# Altium PCB ELOP_V0.90.pcbdoc (part 2 of 2)
Units mm, origin at the board's own origin, x right, y up, seen from the top; angles counter-clockwise.
Board outline 80 x 80.13 mm, 4 copper layers (Top Layer, Mid-Layer 1, Mid-Layer 2, Bottom Layer); 239 components, 164 nets, 744 pads, 242 vias.
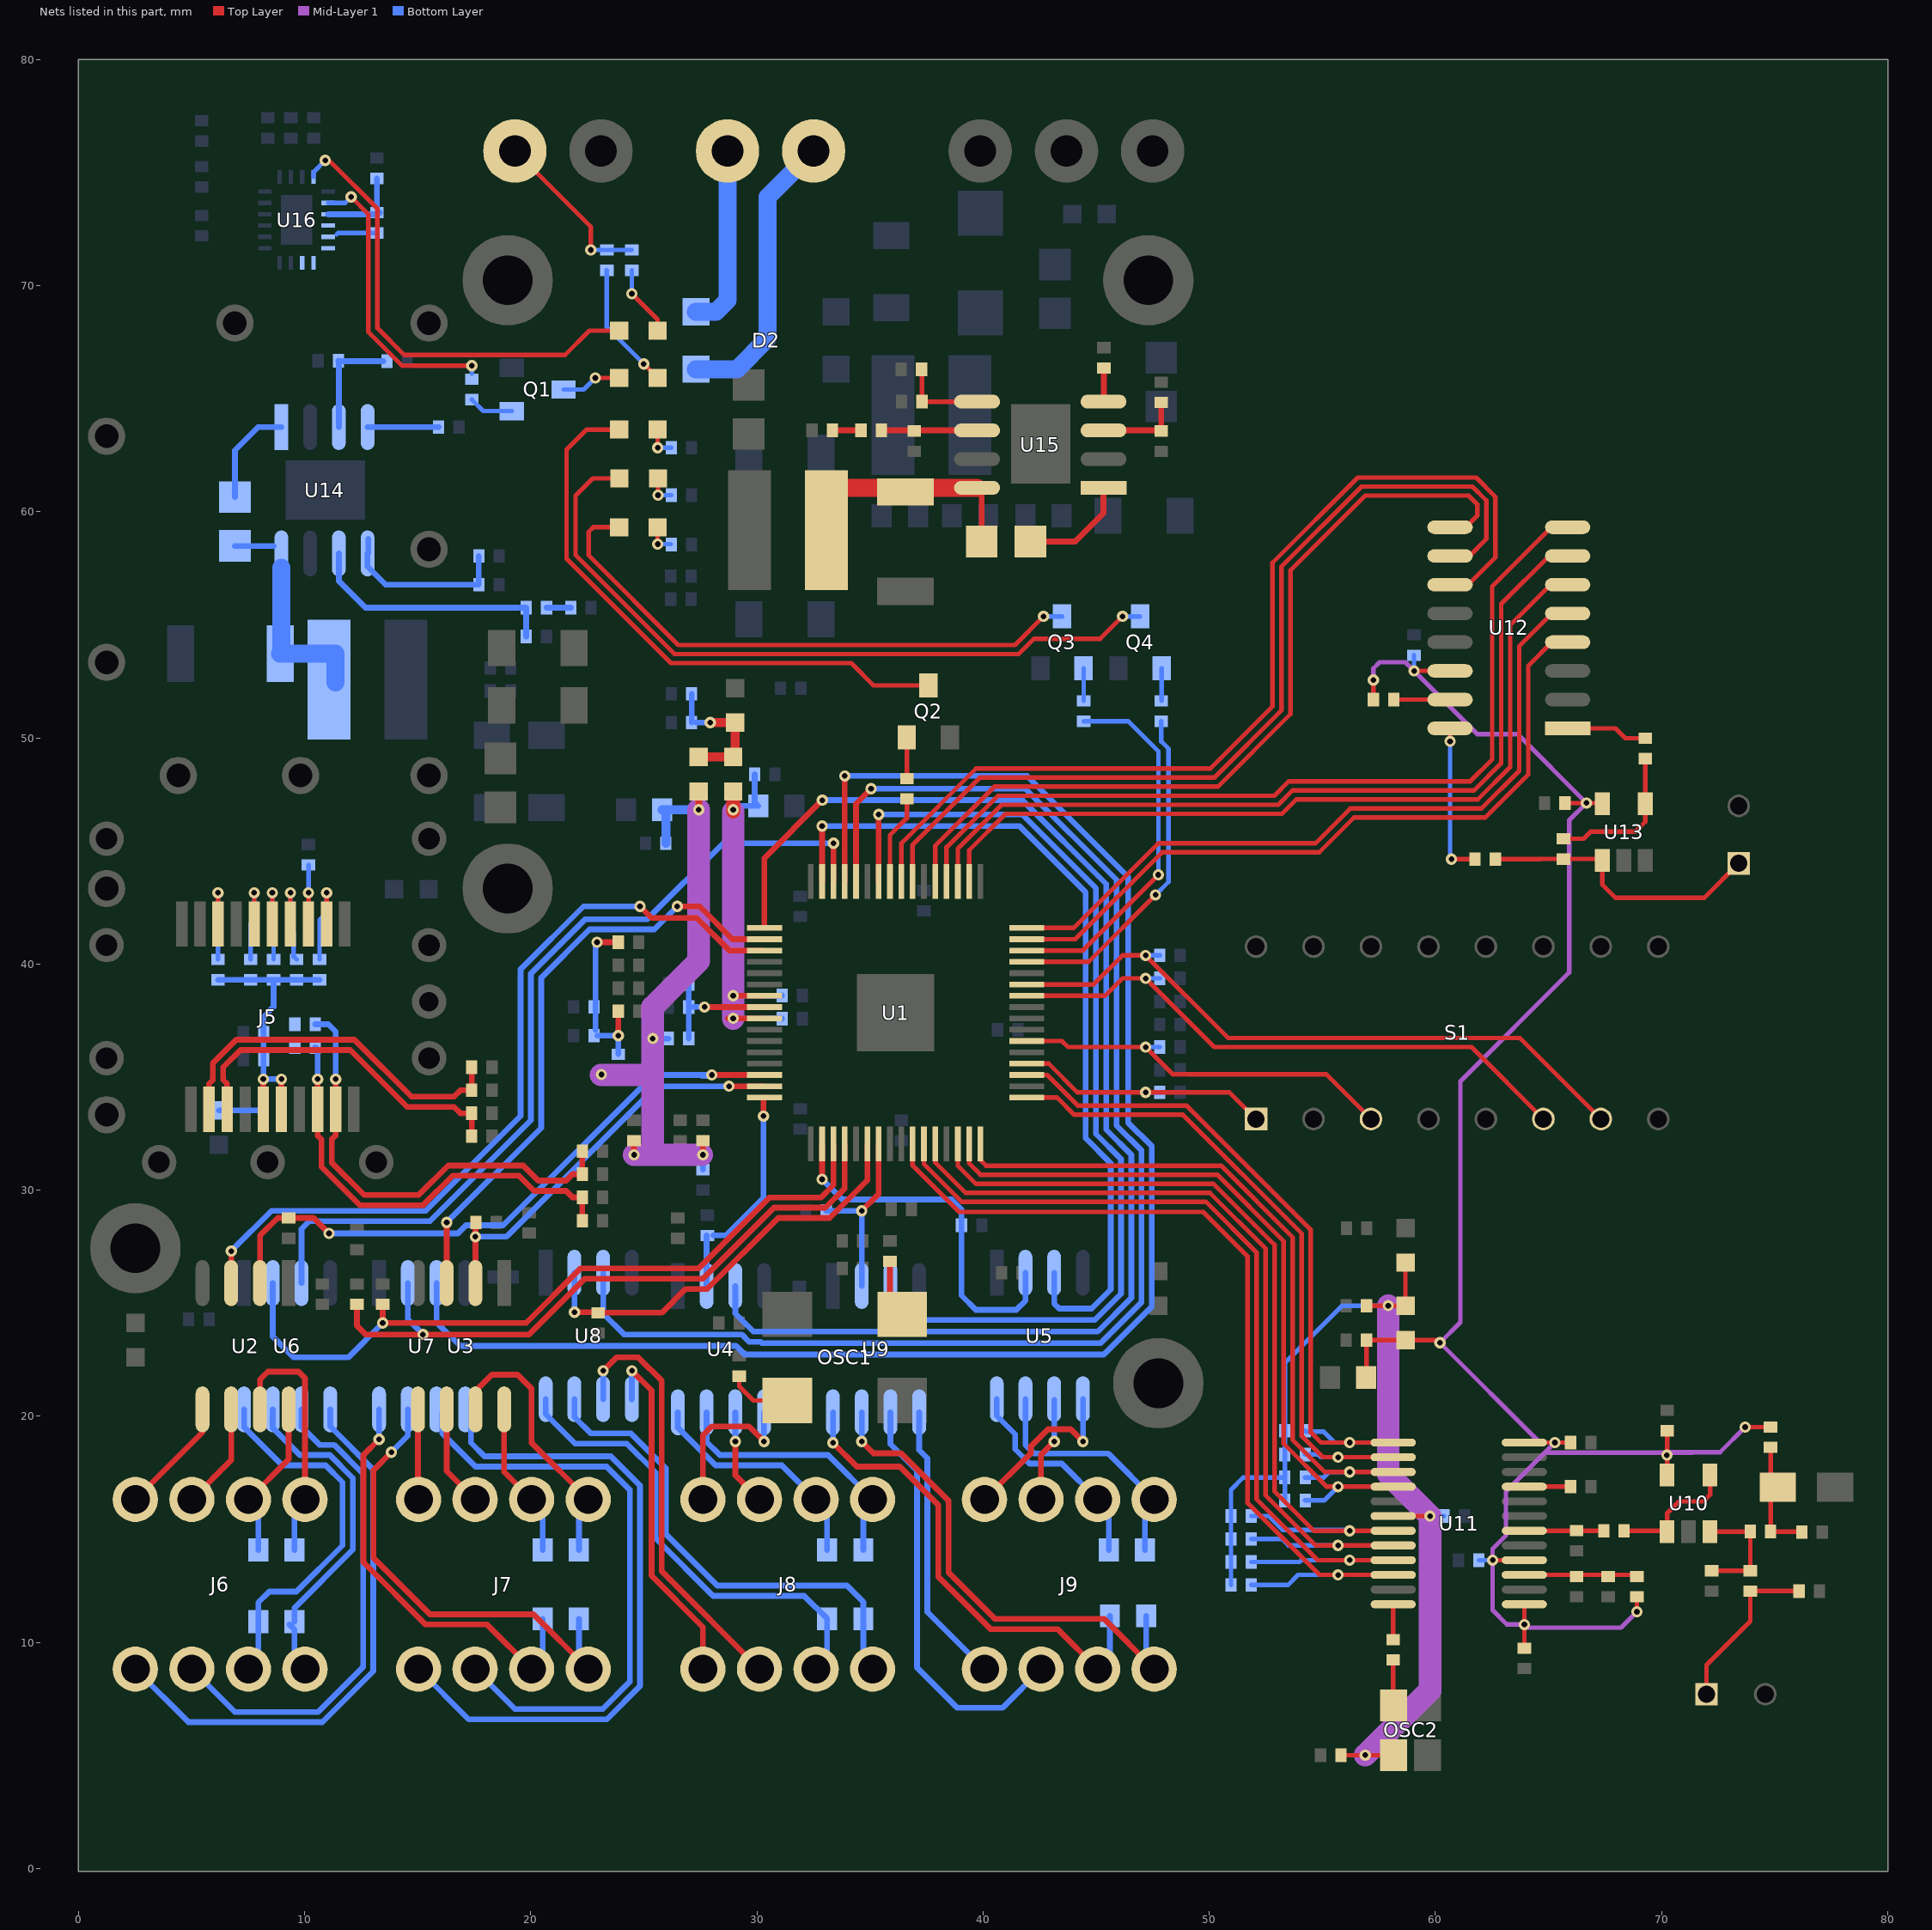
[diagram p4: the nets of this part, all layers, seen from the top]

## Via types
v1: diameter 0.5, hole 0.25, Top Layer to Bottom Layer, 240 vias
v2: diameter 2, hole 1.9, Top Layer to Bottom Layer, 2 vias

## Nets (pads, with @x,y where several pads share a name; then routed paths per layer and width w, separated by ;. In a path a pad name is that pad's centre, name@x,y a point inside that pad or via, vN(x,y) a via of type N, cw(c..) or ccw(c..) an arc to the next point about the centre after c; other vN are vias at no path point) (continued)
N16728327: C19.1 U14.1 | length 4.6
  Bottom Layer w0.254: C19.1@6.927,60.643 6.927,62.711 7.956,63.74 U14.1@8.983,63.74
N16728331: C19.2 L3.1 U14.8 ZD1.2 | length 9.2
  Bottom Layer w0.254: C19.2@6.927,58.484 8.651,58.484
  Bottom Layer w0.8: ZD1.2@8.931,53.721 ZD1.2@8.983,53.721 ; U14.8@8.983,57.517 ZD1.2@8.983,53.721 ; L3.1@11.381,52.451 11.381,53.721 ZD1.2@8.983,53.721
N16728383: R42.2 R45.1 U14.3 | length 4.9
  Bottom Layer w0.254: R42.2@11.502,66.675 R42.2@11.523,66.654 ; U14.3@11.523,63.74 R42.2@11.523,66.654 ; R45.1@13.486,66.654 R42.2@11.523,66.654
N16728489: C20.2 R44.1 U14.6 | length 11.3
  Bottom Layer w0.254: U14.6@11.523,58.152 11.523,56.93 12.7,55.753 R44.1@19.807,55.753 C20.2@19.807,54.483
N16728505: R43.2 R47.1 U14.5 | length 7.8
  Bottom Layer w0.254: U14.5@12.827,58.801 12.827,58.186 U14.5@12.793,58.152 12.793,57.565 13.589,56.769 R43.2@17.711,56.769 R47.1@17.711,58.039
N16728557: R46.1 U14.4 | length 3.1
  Bottom Layer w0.254: U14.4@12.793,63.74 R46.1@15.933,63.74
N16728739: C21.2 R44.2 | length 1.1
  Bottom Layer w0.254: R44.2@20.706,55.753 C21.2@21.775,55.753
N16729351: C22.1 U15.1 | length 4.9
  Top Layer w0.254: C22.1@42.1,58.674 44.069,58.674 45.325,59.93 U15.1@45.325,61.053
N16729355: C22.2 L4.1 U15.8 ZD2.2 | length 10.8
  Top Layer w0.254: U15.8@39.737,61.053 39.941,60.848 C22.2@39.941,58.674
  Top Layer w0.8: L4.1@33.069,59.182 33.069,60.755 33.367,61.053 U15.8@39.737,61.053
N16729407: R48.2 R52.1 U15.3 | length 3.8
  Top Layer w0.254: U15.3@45.325,63.593 47.855,63.593 R48.2@47.879,63.569 R52.1@47.879,64.828
N16729513: C23.2 R51.1 U15.6 | length 4.2
  Top Layer w0.254: R51.1@35.502,63.593 U15.6@39.737,63.593
N16729529: R50.2 R54.1 U15.5 | length 3.8
  Top Layer w0.2: R54.1@37.3,66.274 R50.2@37.3,64.863 U15.5@39.737,64.863
N16729581: R53.1 U15.4 | length 1.5
  Top Layer w0.254: U15.4@45.339,64.877 R53.1@45.339,66.352
N16729763: C24.2 R51.2 | length 1.3
  Top Layer w0.254: C24.2@33.343,63.593 R51.2@34.602,63.593
N16731534: J5.2 R70.1 | length 4.5
  Top Layer w0.2: J5.2@10.982,41.774 v1(10.982,43.149)
  Bottom Layer w0.2: R70.1@10.668,40.203 10.668,41.945 10.982,42.259 v1(10.982,43.149)
N16731538: J5.4 R71.1 | length 4.4
  Top Layer w0.2: J5.4@9.382,41.774 v1(9.382,43.149)
  Bottom Layer w0.2: v1@9.382,43.139 9.382,41.545 9.525,41.402 9.525,40.33 R71.1@9.652,40.203
N16731542: J5.5 R72.1 | length 4.3
  Top Layer w0.2: J5.5@8.582,41.774 v1(8.582,43.149)
  Bottom Layer w0.2: v1@8.582,43.139 8.582,41.837 8.636,41.783 R72.1@8.636,40.203
N16731546: J5.6 R73.1 | length 4.4
  Top Layer w0.2: J5.6@7.782,41.774 v1(7.782,43.149)
  Bottom Layer w0.2: R73.1@7.62,40.203 7.62,41.783 7.782,41.945 v1@7.782,43.139
N16731550: J5.8 R74.1 | length 4.3
  Top Layer w0.2: J5.8@6.182,41.774 v1(6.182,43.149)
  Bottom Layer w0.2: R74.1@6.182,40.203 v1@6.182,43.139
N16735624: OSC1.1 R1.2 | length 2.8
  Top Layer w0.2: R1.2@29.225,21.775 29.225,21.327 29.851,20.701 OSC1.1@31.347,20.701
N16738020: J5.3 R75.2 | length 2.6
  Top Layer w0.2: J5.3@10.182,41.774 v1(10.182,43.149)
  Bottom Layer w0.2: v1@10.182,43.139 v1(10.182,43.149) R75.2@10.182,44.381
N16739629: BC10.1 BC11.1 R8.1 U1.56 | length 5.7
  Top Layer w0.254: v1@27.755,38.1 27.759,38.096 U1.56@30.337,38.096
  Bottom Layer w0.254: R8.1@26.993,36.703 BC11.1@26.993,39.116 ; BC10.1@27.062,38.1 v1@27.755,38.1
  other v1: 27.686,38.1
N16740524: C1.1 R3.1 R5.2 R6.2 R7.1 | length 9.2
  Top Layer w0.254: v1(22.937,40.96) R6.2@23.876,40.96 ; v1(23.876,36.83) R7.1@23.876,37.912
  Bottom Layer w0.254: C1.1@22.871,38.354 22.871,37.084 22.871,40.894 v1(22.937,40.96) ; R3.1@22.94,36.83 v1(23.876,36.83) ; R5.2@23.876,36.012 23.876,37.084
N16750010: R57.2 R63.1 U16.3 | length 3.6
  Bottom Layer w0.254: U16.3@11.052,73.149 13.263,73.149 R57.2@13.335,73.221 ; 13.208,73.476 R63.1@13.208,74.735
N16750728: LD1.1 R49.2 | length 3.1
  Top Layer w0.2: v1(24.473,69.634) 25.616,68.491 LD1.1@25.616,68.003
  Bottom Layer w0.2: v1(24.473,69.634) R49.2@24.473,70.67
N16751148: Q1.1 R59.2 | length 2
  Bottom Layer w0.2: R59.2@17.399,64.955 17.908,64.446 Q1.1@19.166,64.446
N16751168: LD2.2 Q1.3 | length 2.7
  Top Layer w0.2: v1(22.86,65.913) LD2.2@23.914,65.913
  Bottom Layer w0.2: Q1.3@21.459,65.4 22.347,65.4 v1(22.86,65.913)
N16751222: LD2.1 R55.2 | length 5.7
  Top Layer w0.2: v1(25,66.529) LD2.1@25.616,65.913
  Bottom Layer w0.2: R55.2@23.368,70.67 23.368,68.161 v1(25,66.529)
N16760869: C12.2 U11.9 | length 2
  Top Layer w0.2: U11.9@63.931,16.891 C12.2@65.971,16.891
N16760876: C11.2 R24.1 R32.2 U11.3 | length 4.9
  Top Layer w0.2: U11.3@63.931,12.991 R24.1@68.836,12.991
N16761223: R34.2 U11.24 | length 1.6
  Top Layer w0.2: R34.2@58.131,10.128 U11.24@58.131,11.691
N16761347: OSC2.3 R34.1 | length 2
  Top Layer w0.2: R34.1@58.131,9.228 58.131,7.247 OSC2.3@58.156,7.222
N16761501: R36.2 U12.1 | length 3.6
  Top Layer w0.2: U12.1@65.846,50.419 67.957,50.419 68.396,49.98 R36.2@69.276,49.98
N16765774: C13.2 R36.1 U13.4 | length 6.7
  Top Layer w0.2: C13.2@65.659,45.535 66.548,45.535 66.86,45.847 68.834,45.847 69.276,46.289 U13.4@69.276,47.083 R36.1@69.276,49.08
N16765905: R35.2 U12.16 | length 7
  Top Layer w0.2: v1(60.646,49.844) U12.16@60.646,50.419 ; v1@60.772,44.704 v1(60.705,44.637) 61.746,44.637 R35.2@61.751,44.633
  Bottom Layer w0.2: v1(60.646,49.844) 60.646,44.637 v1(60.705,44.637)
N16765917: C13.1 J1.1 R35.1 U13.1 | length 12.7
  Top Layer w0.2: R35.1@62.651,44.633 64.638,44.633 ; 64.643,44.646 U13.1@67.376,44.646 ; U13.1@67.376,44.583 67.376,43.507 67.957,42.926 71.882,42.926 J1.1@73.406,44.45
N16767696: R37.2 U12.15 | length 2.5
  Top Layer w0.2: R37.2@58.156,51.689 U12.15@60.646,51.689
N16768762: R21.2 U10.1 U10.4 | length 5.7
  Top Layer w0.2: R21.2@68.339,14.941 U10.1@70.104,14.941 ; U10.1@70.241,14.905 70.241,15.713 70.769,16.241 71.846,16.241 72.141,16.536 U10.4@72.141,17.405
N16768766: C10.1 R21.1 U11.6 | length 3.5
  Top Layer w0.2: U11.6@63.931,14.941 R21.1@67.439,14.941
N16769025: R20.1 R22.1 R23.2 U10.3 | length 5.1
  Top Layer w0.2: U10.3@72.141,14.905 R20.1@73.916,14.905 R22.1@73.916,13.303 ; R23.2@72.213,13.176 R22.1@73.916,13.176
N16769514: C9.1 MIC1.1 R22.2 | length 7.5
  Top Layer w0.2: MIC1.1@71.979,7.715 71.979,9.006 73.916,10.943 R22.2@73.916,12.276 C9.1@76.075,12.276
N16770088: C7.1 C8.1 R19.1 R20.2 | length 5.1
  Top Layer w0.2: R19.1@74.816,18.568 R20.2@74.816,14.905 76.182,14.905 C8.1@76.202,14.885
N16775363: LD3.1 R91.2 | length 1.4
  Top Layer w0.2: v1(25.616,62.827) LD3.1@25.616,63.627
  Bottom Layer w0.2: v1(25.616,62.827) R91.2@26.22,62.827
N16775383: LD3.2 Q2.3 | length 25.8
  Top Layer w0.2: LD3.2@23.914,63.627 22.479,63.627 21.59,62.738 21.59,57.912 26.2,53.302 34.171,53.302 35.153,52.32 Q2.3@37.582,52.32
N16775429: Q2.1 R92.2 | length 1.9
  Top Layer w0.2: R92.2@36.633,48.214 Q2.1@36.633,50.154
N16776229: LD4.1 R93.2 | length 1.4
  Top Layer w0.2: v1(25.616,58.563) LD4.1@25.616,59.309 LD4.1@25.632,59.325
  Bottom Layer w0.2: v1(25.616,58.563) R93.2@26.204,58.563
N16776249: LD4.2 Q3.3 | length 25.6
  Top Layer w0.2: LD4.2@23.914,59.309 22.771,59.309 22.566,59.104 22.566,58.068 26.531,54.102 41.41,54.102 v1(42.676,55.368)
  Bottom Layer w0.2: v1(42.676,55.368) Q3.3@43.493,55.368
N16776289: Q3.1 R94.2 | length 1.4
  Bottom Layer w0.2: R94.2@44.447,51.631 Q3.1@44.447,53.075
N16776515: LD5.1 R95.2 | length 1.3
  Top Layer w0.2: v1(25.632,60.728) LD5.1@25.632,61.468
  Bottom Layer w0.2: v1(25.632,60.728) R95.2@26.22,60.728
N16776535: LD5.2 Q4.3 | length 32.3
  Top Layer w0.2: LD5.2@23.93,61.468 22.752,61.468 21.99,60.706 21.99,58.078 26.366,53.702 41.575,53.702 42.248,54.375 45.177,54.375 v1(46.17,55.368)
  Bottom Layer w0.2: v1(46.17,55.368) Q4.3@46.94,55.368
N16776575: Q4.1 R96.2 | length 1.4
  Bottom Layer w0.2: R96.2@47.894,51.646 Q4.1@47.894,53.075
N16788461: OSC1.3 R97.1 | length 1.6
  Top Layer w0.254: OSC1.3@35.883,25.273 R97.1@35.883,26.855
PD_A: D2.2 J4.1 | length 8.2
  Bottom Layer w0.8: D2.2@27.307,68.835 28.195,68.835 28.702,69.342 J4.1@28.702,75.946
PD_B: D2.1 J4.2 | length 12.9
  Bottom Layer w0.8: D2.1@27.307,66.295 29.122,66.295 30.48,67.653 30.48,73.914 J4.2@32.512,75.946
POWER_FAULT: LD1.2 U16.20 | length 21
  Top Layer w0.2: v1(10.922,75.53) 11.086,75.53 13.227,73.388 13.227,68.111 14.409,66.929 21.521,66.929 22.595,68.003 LD1.2@23.914,68.003
  Bottom Layer w0.2: U16.20@10.402,74.799 10.402,75.01 v1(10.922,75.53)
POWER_GOOD: R59.1 U16.2 | length 12.9
  Top Layer w0.2: v1(12.065,73.914) 12.827,73.152 12.827,67.945 14.316,66.456 v1(17.399,66.456)
  Bottom Layer w0.2: U16.2@11.052,73.649 11.8,73.649 v1(12.065,73.914) ; 17.399,66.109 v1(17.399,66.456)
PRBSEN: R89.2 S1.6 U1.26 | length 26.4
  Top Layer w0.2: U1.26@41.937,38.596 45.403,38.596 46.17,39.363 v1(47.186,39.363) 50.222,36.327 61.59,36.327 S1.6@64.77,33.147 ; v1@47.119,39.43 v1@47.186,39.497
  Bottom Layer w0.2: v1(47.186,39.363) R89.2@47.815,39.363
PSE_A: J3.1 R49.1 R55.1 R57.1 U16.4 U16.5 U16.6 U16.7 U16.8 | length 9.7
  Top Layer w0.2: J3.1@19.304,75.946 22.664,72.586 v1(22.664,71.57)
  Bottom Layer w0.2: 11.43,72.263 11.488,72.321 R57.1@13.208,72.321 ; J3.1@19.304,75.634 J3.1@19.304,75.946 ; v1(22.664,71.57) R55.1@23.368,71.57 R49.1@24.473,71.57
R422RX_N0: J6.A4 R76.1 U2.7 | length 11.4
  Top Layer w0.254: U2.7@8.035,20.306 8.035,21.624 8.382,21.971 9.739,21.971 10.027,21.683 J6.A4@10.027,16.323
  Bottom Layer w0.254: R76.1@9.563,14.097 9.563,15.859 J6.A4@10.027,16.323
R422RX_N1: J7.A4 R77.1 U3.7 | length 12.2
  Top Layer w0.254: U3.7@17.56,20.306 17.56,21.116 18.288,21.844 19.417,21.844 20.046,21.215 20.046,18.823 J7.A4@22.546,16.323
  Bottom Layer w0.254: R77.1@22.136,14.097 22.136,15.913 J7.A4@22.546,16.323
R422RX_N2: J8.A4 R78.1 U4.7 | length 12.1
  Bottom Layer w0.254: U4.7@27.779,20.179 27.779,18.871 28.362,18.288 33.154,18.288 J8.A4@35.119,16.323 34.709,15.913 R78.1@34.709,14.097
R422RX_N3: J9.A4 R79.1 U5.7 | length 11.1
  Bottom Layer w0.254: U5.7@41.876,20.76 41.876,18.733 42.248,18.361 45.527,18.361 J9.A4@47.565,16.323 47.155,15.913 R79.1@47.155,14.097
R422RX_N4: J6.B4 R80.1 U6.7 | length 15
  Bottom Layer w0.254: U6.7@8.602,20.306 8.602,19.48 9.794,18.288 11.124,18.288 12.138,17.274 12.138,14.671 12.138,14.104 9.563,11.529 R80.1@9.563,10.922 ; R80.1@9.34,10.795 9.563,10.572 9.563,9.287 J6.B4@10.027,8.823
R422RX_N5: J7.B4 R81.1 U7.7 | length 21.1
  Top Layer w0.254: v1(13.843,18.415) 13.058,17.63 13.058,13.739 15.548,11.249 20.12,11.249 J7.B4@22.546,8.823
  Bottom Layer w0.254: v1(13.843,18.415) 14.571,19.143 U7.7@14.571,20.306 ; R81.1@22.136,11.049 22.136,9.233 J7.B4@22.546,8.823
R422RX_N6: J8.B4 R82.1 U8.7 | length 21.8
  Bottom Layer w0.254: U8.7@21.937,20.76 21.937,19.973 22.665,19.245 24.443,19.245 25.981,17.707 25.981,14.793 28.255,12.519 33.982,12.519 34.709,11.792 R82.1@34.709,11.049 34.709,9.233 J8.B4@35.119,8.823
R422RX_N7: J9.B4 R83.1 U9.7 | length 22.7
  Top Layer w0.254: v1(34.637,18.889) 35.157,18.369 36.375,18.369 38.481,16.263 38.481,13.088 40.52,11.049 45.339,11.049 J9.B4@47.565,8.823
  Bottom Layer w0.254: v1(34.637,18.889) U9.7@34.637,20.179 ; R83.1@47.21,11.176 47.21,9.178 J9.B4@47.565,8.823
R422RX_P0: J6.A3 R76.2 U2.8 | length 7.1
  Top Layer w0.254: J6.A3@7.527,16.323 9.305,18.101 U2.8@9.305,20.306
  Bottom Layer w0.254: J6.A3@7.527,16.323 7.963,15.887 R76.2@7.963,14.097
R422RX_P1: J7.A3 R77.2 U3.8 | length 6.9
  Top Layer w0.254: U3.8@18.83,20.306 18.83,17.539 J7.A3@20.046,16.323
  Bottom Layer w0.254: J7.A3@20.046,16.323 20.536,15.833 R77.2@20.536,14.097
R422RX_P2: J8.A3 R78.2 U4.8 | length 10.5
  Bottom Layer w0.254: U4.8@26.509,20.179 26.509,19.499 28.174,17.834 31.108,17.834 J8.A3@32.619,16.323 33.109,15.833 R78.2@33.109,14.097
R422RX_P3: J9.A3 R79.2 U5.8 | length 9.5
  Bottom Layer w0.254: U5.8@40.606,20.76 40.606,20.026 41.422,19.21 41.422,18.545 42.06,17.907 43.481,17.907 J9.A3@45.065,16.323 45.555,15.833 R79.2@45.555,14.097
R422RX_P4: J6.B3 R80.2 U6.8 | length 16.8
  Bottom Layer w0.254: U6.8@7.332,20.306 7.332,19.523 9.021,17.834 10.936,17.834 11.684,17.086 11.684,14.292 9.647,12.255 8.445,12.255 7.963,11.773 7.963,9.259 J6.B3@7.527,8.823
R422RX_P5: J7.B3 R81.2 U7.8 | length 18.9
  Top Layer w0.254: v1(13.301,18.982) 12.604,18.285 12.604,13.551 15.36,10.795 18.074,10.795 J7.B3@20.046,8.823
  Bottom Layer w0.254: v1(13.301,18.982) U7.8@13.301,20.306 ; J7.B3@20.046,8.823 20.536,9.313 R81.2@20.536,11.049
R422RX_P6: J8.B3 R82.2 U8.8 | length 21
  Bottom Layer w0.254: U8.8@20.667,20.76 20.667,20.1 21.976,18.791 24.255,18.791 25.527,17.519 25.527,14.605 28.067,12.065 32.093,12.065 R82.2@33.109,11.049 33.109,9.313 J8.B3@32.619,8.823
R422RX_P7: J9.B3 R83.2 U9.8 | length 21.6
  Top Layer w0.254: v1(33.367,18.83) 34.417,17.78 36.322,17.78 38.027,16.075 38.027,12.9 40.332,10.595 43.293,10.595 J9.B3@45.065,8.823
  Bottom Layer w0.254: v1(33.367,18.83) U9.8@33.367,20.179 ; J9.B3@45.065,8.823 45.61,9.368 R83.2@45.61,11.176
R422TX_N0: J6.A2 U2.6 | length 4.7
  Top Layer w0.254: J6.A2@5.027,16.323 6.765,18.061 U2.6@6.765,20.306
R422TX_N1: J7.A2 U3.6 | length 4.8
  Top Layer w0.254: U3.6@16.29,20.306 16.29,17.579 J7.A2@17.546,16.323 J7.A2@17.546,16.617
R422TX_N2: J8.A2 U4.6 | length 4.3
  Top Layer w0.254: v1(29.049,18.889) 29.049,17.393 J8.A2@30.119,16.323
  Bottom Layer w0.254: v1(29.049,18.889) U4.6@29.049,20.179
R422TX_N3: J9.A2 U5.6 | length 4.6
  Top Layer w0.254: J9.A2@42.565,16.323 42.565,18.308 v1(43.146,18.889)
  Bottom Layer w0.254: v1(43.146,18.889) U5.6@43.146,20.726
R422TX_N4: J6.B2 U6.6 | length 22.1
  Bottom Layer w0.254: J6.B2@5.027,8.823 6.919,6.931 10.607,6.931 12.592,8.916 12.592,17.462 11.312,18.742 10.668,18.742 9.872,19.538 U6.6@9.872,20.306
R422TX_N5: J7.B2 U7.6 | length 26.8
  Bottom Layer w0.254: U7.6@16.095,20.179 16.095,19.245 17.56,17.78 23.361,17.78 24.384,16.757 24.384,8.262 23.18,7.058 19.311,7.058 J7.B2@17.546,8.823
R422TX_N6: J8.B2 U8.6 | length 19.1
  Top Layer w0.254: v1(23.207,22.016) 23.797,22.606 24.765,22.606 25.8,21.571 25.8,13.142 J8.B2@30.119,8.823
  Bottom Layer w0.254: U8.6@23.207,20.76 v1(23.207,22.016)
R422TX_N7: J9.B2 U9.6 | length 18.7
  Bottom Layer w0.254: U9.6@35.907,20.179 35.907,18.776 37.084,17.599 37.084,8.89 38.862,7.112 40.854,7.112 J9.B2@42.565,8.823
R422TX_P0: J6.A1 U2.5 | length 5.8
  Top Layer w0.254: J6.A1@2.527,16.957 J6.A1@2.527,16.323 5.495,19.291 U2.5@5.495,20.306
R422TX_P1: J7.A1 U3.5 | length 4
  Top Layer w0.254: U3.5@15.02,20.306 15.02,16.349 J7.A1@15.046,16.323
R422TX_P2: J8.A1 U4.5 | length 7.3
  Top Layer w0.254: J8.A1@27.619,16.323 27.619,19.166 28.011,19.558 29.65,19.558 v1(30.319,18.889)
  Bottom Layer w0.254: v1(30.319,18.889) U4.5@30.319,20.179
R422TX_P3: J9.A1 U5.5 | length 7.9
  Top Layer w0.254: J9.A1@40.065,16.323 42.111,18.369 42.111,18.669 42.873,19.431 43.874,19.431 v1(44.416,18.889)
  Bottom Layer w0.254: v1(44.416,18.889) U5.5@44.416,20.76
R422TX_P4: J6.B1 U6.5 | length 24.8
  Bottom Layer w0.254: J6.B1@2.527,8.823 4.873,6.477 10.795,6.477 13.046,8.728 13.046,17.65 11.142,19.554 U6.5@11.142,20.306
R422TX_P5: J7.B1 U7.5 | length 30.5
  Bottom Layer w0.254: J7.B1@15.046,8.823 17.265,6.604 23.368,6.604 24.838,8.074 24.838,16.945 23.549,18.234 17.961,18.234 17.365,18.83 U7.5@17.365,20.862
R422TX_P6: J8.B1 U8.5 | length 15.8
  Top Layer w0.254: v1(24.477,22.016) 25.346,21.147 25.346,12.954 27.619,10.681 J8.B1@27.619,8.823
  Bottom Layer w0.254: U8.5@24.477,20.76 v1(24.477,22.016)
R422TX_P7: J9.B1 U9.5 | length 12.6
  Bottom Layer w0.254: U9.5@37.177,20.179 37.177,18.509 37.538,18.148 37.538,11.35 J9.B1@40.065,8.823
RX_CLK: R92.1 U1.41 | length 4
  Top Layer w0.2: U1.41@35.887,43.646 35.887,45.698 36.633,46.444 R92.1@36.633,47.302
RX_DV: R94.1 U1.30 | length 16.5
  Top Layer w0.2: U1.30@41.937,40.596 44.406,40.596 v1(47.752,43.942)
  Bottom Layer w0.2: R94.1@44.447,50.731 46.424,50.731 47.752,49.403 v1(47.752,43.942)
RX_ER: R96.1 U1.29 | length 15
  Top Layer w0.2: U1.29@41.937,40.096 44.668,40.096 v1(47.625,43.053)
  Bottom Layer w0.2: v1(47.625,43.053) 48.202,43.63 48.202,49.519 47.879,49.842 R96.1@47.879,50.731
RXD0: U1.51 U2.3 | length 35.9
  Top Layer w0.254: U2.3@6.765,25.894 v1(6.765,27.305) ; v1(24.834,42.545) 25.342,42.037 27.337,42.037 28.778,40.596 U1.51@30.337,40.596
  Bottom Layer w0.254: v1(6.765,27.305) 8.543,29.083 15.36,29.083 19.558,33.281 19.558,39.765 22.338,42.545 v1(24.834,42.545)
RXD1: U1.50 U3.3 | length 27
  Top Layer w0.254: U3.3@16.29,25.894 v1(16.29,28.575) ; v1(26.485,42.545) 27.471,42.545 28.92,41.096 U1.50@30.337,41.096
  Bottom Layer w0.254: v1(16.29,28.575) 20.466,32.751 20.466,39.389 22.606,41.529 25.469,41.529 v1(26.485,42.545)
RXD2: U1.49 U4.3 | length 59.2
  Top Layer w0.254: U1.49@30.337,41.596 30.337,44.688 v1(32.893,47.244)
  Bottom Layer w0.254: U4.3@29.049,25.767 29.049,24.545 29.845,23.749 45.07,23.749 46.555,25.234 46.555,31.564 45.447,32.672 45.447,43.536 41.739,47.244 v1(32.893,47.244)
RXD3: U1.47 U5.3 | length 37.6
  Top Layer w0.254: U1.47@32.887,43.646 v1(32.887,46.101)
  Bottom Layer w0.254: v1(32.887,46.101) 41.598,46.101 44.539,43.16 44.539,32.296 45.647,31.188 45.647,25.61 44.802,24.765 43.364,24.765 43.146,24.983 U5.3@43.146,26.348
RXD4: U1.46 U6.3 | length 38.5
  Top Layer w0.254: U1.46@33.387,43.646 v1(33.387,45.339)
  Bottom Layer w0.254: U6.3@9.872,25.894 9.872,28.287 10.214,28.629 15.548,28.629 20.012,33.093 20.012,39.577 22.418,41.983 25.161,41.983 28.517,45.339 v1(33.387,45.339)
RXD5: U1.45 U7.3 | length 73.3
  Top Layer w0.254: U1.45@33.887,43.646 v1(33.887,48.314)
  Bottom Layer w0.254: U7.3@15.841,25.894 15.841,24.164 16.891,23.114 29.083,23.114 29.464,22.733 45.338,22.733 47.463,24.858 47.463,31.94 46.41,32.993 46.41,43.857 41.953,48.314 v1(33.887,48.314)
RXD6: U1.44 U8.3 | length 62.9
  Top Layer w0.254: U1.44@34.387,43.646 34.387,47.087 v1(35.052,47.752)
  Bottom Layer w0.254: U8.3@23.207,26.348 23.207,24.545 24.13,23.622 29.33,23.622 29.657,23.295 30.172,23.295 30.226,23.241 45.204,23.241 47.009,25.046 47.009,31.752 45.901,32.86 45.901,43.724 41.873,47.752 v1(35.052,47.752)
RXD7: U1.42 U9.3 | length 43.3
  Top Layer w0.254: U1.42@35.387,43.646 v1(35.387,46.609)
  Bottom Layer w0.254: v1(35.387,46.609) 41.732,46.609 44.993,43.348 44.993,32.484 46.101,31.376 46.101,25.422 44.936,24.257 36.703,24.257 U9.3@35.907,25.053
RXD8: U1.40 U12.11 | length 43.9
  Top Layer w0.2: U1.40@36.387,43.646 36.387,45.335 39.693,48.641 50.05,48.641 52.794,51.385 52.794,57.735 56.565,61.506 61.799,61.506 62.649,60.656 62.649,57.979 61.439,56.769 U12.11@60.646,56.769
RXD9: U1.39 U12.10 | length 41.1
  Top Layer w0.2: U1.39@36.887,43.646 36.887,45.269 39.859,48.241 50.215,48.241 53.194,51.22 53.194,57.57 56.73,61.106 61.634,61.106 62.249,60.491 62.249,58.792 61.496,58.039 U12.10@60.646,58.039
RXD10: U1.37 U12.9 | length 37.8
  Top Layer w0.2: U1.37@37.887,43.646 37.887,45.23 40.498,47.841 50.381,47.841 53.594,51.054 53.594,57.404 56.896,60.706 61.468,60.706 61.849,60.325 61.849,59.817 61.341,59.309 U12.9@60.646,59.309
RXD11: U1.36 U12.8 | length 39.3
  Top Layer w0.2: U1.36@38.387,43.646 38.387,45.164 40.664,47.441 52.882,47.441 53.517,48.076 61.538,48.076 62.503,49.041 62.503,56.693 65.119,59.309 U12.8@65.846,59.309
RXD12: U1.35 U12.7 | length 37.9
  Top Layer w0.2: U1.35@38.887,43.646 38.887,45.099 40.829,47.041 53.047,47.041 53.682,47.676 61.704,47.676 62.903,48.875 62.903,55.918 65.024,58.039 U12.7@65.846,58.039
RXD13: U1.34 U12.6 | length 36.4
  Top Layer w0.2: U1.34@39.387,43.646 39.387,45.033 40.995,46.641 53.213,46.641 53.848,47.276 61.869,47.276 63.303,48.71 63.303,54.984 65.087,56.769 U12.6@65.846,56.769
RXD14: U1.32 U12.5 | length 32.9
  Top Layer w0.2: U1.32@41.937,41.596 44.009,41.596 47.752,45.339 54.699,45.339 56.236,46.876 62.035,46.876 63.703,48.544 63.703,54.052 65.15,55.499 U12.5@65.846,55.499
RXD15: U1.31 U12.4 | length 32.2
  Top Layer w0.2: U1.31@41.937,41.096 44.075,41.096 47.918,44.939 54.865,44.939 56.402,46.476 62.201,46.476 64.103,48.378 64.103,53.181 65.151,54.229 U12.4@65.846,54.229
SFP0_RX_N: C29.2 J5.12 R69.2 | length 16.2
  Top Layer w0.254: J5.12@5.782,33.575 5.782,34.704 5.955,34.877 5.955,35.621 6.985,36.651 12.215,36.651 14.73,34.136 16.618,34.136 16.899,34.417 C29.2@17.397,34.417 R69.2@17.397,35.433
SFP0_RX_P: C28.2 J5.13 R68.2 | length 15.4
  Top Layer w0.254: J5.13@6.582,33.575 6.582,34.704 6.409,34.877 6.409,35.433 7.173,36.197 12.027,36.197 14.542,33.682 16.618,33.682 16.899,33.401 C28.2@17.397,33.401 R68.2@17.397,32.385
SFP0_TX_N: C26.2 J5.19 R64.1 R65.2 | length 20.5
  Top Layer w0.254: v1(11.382,34.911) J5.19@11.382,33.575 11.382,32.418 11.209,32.245 11.209,31.215 12.633,29.791 15.059,29.791 16.358,31.09 19.677,31.09 20.342,30.425 21.567,30.425 21.852,30.71 C26.2@22.287,30.71 R65.2@22.287,31.726
  Bottom Layer w0.254: R64.1@10.477,37.338 11.058,37.338 11.382,37.014 v1(11.382,34.911)
SFP0_TX_P: C27.2 J5.18 R66.1 R67.2 | length 19.6
  Top Layer w0.254: v1(10.582,34.911) J5.18@10.582,33.575 10.582,32.418 10.755,32.245 10.755,31.027 12.445,29.337 15.247,29.337 16.546,30.636 19.489,30.636 20.154,29.971 21.567,29.971 21.852,29.686 C27.2@22.287,29.686 R67.2@22.287,28.649
  Bottom Layer w0.254: R66.1@10.477,36.322 10.582,36.217 v1(10.582,34.911)
SFP_3V3A: BC57.2 BC58.2 FB7.2 J5.15 J5.16 R64.2 R66.2 R70.2 R71.2 R72.2 R73.2 R74.2 | length 15.7
  Top Layer w0.254: J5.15@8.182,33.575 v1(8.182,34.911) ; J5.16@8.982,33.575 v1(8.982,34.911)
  Bottom Layer w0.254: R74.2@6.182,39.303 R73.2@7.62,39.303 R72.2@8.636,39.303 ; FB7.2@6.223,33.53 7.965,33.53 8.182,33.747 v1(8.182,34.911) v1(8.982,34.911) ; v1@8.197,34.911 BC58.2@8.197,36.957 8.197,37.668 8.636,38.107 R72.2@8.636,39.303 ; R70.2@10.668,39.303 R72.2@8.636,39.303
TEST_EN: R90.2 S1.7 U1.27 | length 29.6
  Top Layer w0.2: U1.27@41.937,39.096 44.887,39.096 46.17,40.379 v1(47.186,40.379) 50.838,36.727 63.73,36.727 S1.7@67.31,33.147 ; v1@47.119,40.446 v1@47.186,40.513
  Bottom Layer w0.2: v1(47.186,40.379) R90.2@47.815,40.379
TX_EN: R84.2 S1.1 U1.20 | length 11.8
  Top Layer w0.2: U1.20@41.937,35.596 42.901,35.596 44.17,34.327 v1(47.186,34.327) 50.89,34.327 S1.1@52.07,33.147
  Bottom Layer w0.2: v1(47.186,34.327) R84.2@47.815,34.327
TX_ER: R85.2 S1.3 U1.22 | length 17.3
  Top Layer w0.2: U1.22@41.937,36.596 43.488,36.596 43.757,36.327 v1(47.186,36.327) 48.386,35.127 55.17,35.127 S1.3@57.15,33.147
  Bottom Layer w0.2: v1(47.186,36.327) R85.2@47.815,36.327
TXD0: R11.1 U1.62 U2.2 | length 28.4
  Top Layer w0.254: U2.2@8.035,25.894 8.035,27.989 8.817,28.771 R11.1@9.305,28.771 10.405,28.771 v1(11.089,28.087) ; v1(28.009,35.096) U1.62@30.337,35.096
  Bottom Layer w0.254: v1(11.089,28.087) 16.784,28.087 17.145,28.448 18.789,28.448 25.437,35.096 v1(28.009,35.096) 27.963,35.05 27.585,35.05
TXD1: R12.1 U1.63 U3.2 | length 18.2
  Top Layer w0.254: U3.2@17.56,25.894 v1(17.56,27.94) R12.1@17.56,28.551 ; v1(28.771,34.596) U1.63@30.337,34.596
  Bottom Layer w0.254: v1(17.56,27.94) 18.923,27.94 25.579,34.596 v1(28.771,34.596)
TXD2: R13.1 U1.64 U4.2 | length 9.6
  Top Layer w0.254: v1(30.295,33.274) 30.295,34.054 U1.64@30.337,34.096
  Bottom Layer w0.254: U4.2@27.779,25.767 R13.1@27.779,27.998 ; R13.1@28.078,27.998 28.633,27.998 30.295,29.66 v1(30.295,33.274)
TXD3: R14.1 U1.2 U5.2 | length 16.6
  Top Layer w0.254: v1(32.887,30.48) U1.2@32.887,32.046
  Bottom Layer w0.254: v1(32.887,30.48) 33.776,29.591 38.608,29.591 39.047,29.152 R14.1@39.047,28.448 39.047,25.342 39.678,24.711 41.475,24.711 41.876,25.112 U5.2@41.876,26.348
TXD4: R15.1 U1.3 U6.2 | length 33.3
  Top Layer w0.254: R15.1@13.462,24.95 v1(13.462,24.13) 19.805,24.13 22.218,26.543 27.432,26.543 30.568,29.679 32.842,29.679 33.387,30.224 U1.3@33.387,32.046
  Bottom Layer w0.254: U6.2@8.602,25.894 8.602,23.529 9.525,22.606 11.938,22.606 v1(13.462,24.13)
TXD5: R16.1 U1.4 U7.2 | length 29.9
  Top Layer w0.254: R16.1@12.319,24.95 12.319,24.003 12.7,23.622 v1(15.24,23.622) 19.939,23.622 22.406,26.089 27.62,26.089 30.756,29.225 33.03,29.225 33.887,30.082 U1.4@33.887,32.046
  Bottom Layer w0.254: U7.2@14.571,25.894 14.571,24.291 v1(15.24,23.622)
TXD6: R17.1 U1.6 U8.2 | length 18.7
  Top Layer w0.254: v1(21.937,24.604) R17.1@22.987,24.604 ; R17.1@22.987,24.58 25.799,24.58 26.854,25.635 27.808,25.635 30.944,28.771 33.218,28.771 34.887,30.44 U1.6@34.887,32.046
  Bottom Layer w0.254: v1(21.937,24.604) U8.2@21.937,26.348
TXD7: R18.1 U1.7 U9.2 | length 8.2
  Top Layer w0.254: v1(34.637,29.083) 35.387,29.833 U1.7@35.387,32.046
  Bottom Layer w0.254: R18.1@33.069,29.083 v1(34.637,29.083) U9.2@34.637,25.767
TXD8: R25.2 U1.10 U11.22 | length 40.1
  Top Layer w0.2: U1.10@36.887,32.046 36.887,31.09 38.938,29.039 49.735,29.039 51.689,27.085 51.689,16.18 54.878,12.991 U11.22@58.131,12.991
  Bottom Layer w0.2: R25.2@51.861,12.545 53.484,12.545 53.93,12.991 v1(55.693,12.991)
TXD9: R26.2 U1.11 U11.21 | length 39.7
  Top Layer w0.2: U1.11@37.387,32.046 37.387,31.156 39.06,29.483 49.857,29.483 52.089,27.251 52.089,16.346 54.794,13.641 v1(56.205,13.641) U11.21@58.131,13.641
  Bottom Layer w0.2: R26.2@51.861,13.561 53.992,13.561 54.072,13.641 v1(56.205,13.641)
TXD10: R27.2 U1.12 U11.20 | length 38.4
  Top Layer w0.2: U1.12@37.887,32.046 37.887,31.222 39.226,29.883 50.023,29.883 52.489,27.417 52.489,16.511 54.709,14.291 U11.20@58.131,14.291
  Bottom Layer w0.2: R27.2@51.861,14.577 53.211,14.577 53.497,14.291 v1(55.693,14.291)
TXD11: R28.2 U1.14 U11.19 | length 37.9
  Top Layer w0.2: U1.14@38.887,32.046 38.887,31.08 39.684,30.283 50.188,30.283 52.889,27.582 52.889,16.677 54.625,14.941 v1(56.205,14.941) U11.19@58.131,14.941
  Bottom Layer w0.2: R28.2@51.861,15.593 52.63,15.593 53.246,14.977 56.169,14.977 v1(56.205,14.941)
TXD12: R29.2 U1.15 U11.16 | length 32.5
  Top Layer w0.2: U1.15@39.387,32.046 39.387,31.184 39.888,30.683 50.354,30.683 53.289,27.748 53.289,18.794 55.192,16.891 U11.16@58.131,16.891
  Bottom Layer w0.2: R29.2@54.242,16.282 55.084,16.282 v1(55.693,16.891)
TXD13: R30.2 U1.16 U11.15 | length 32
  Top Layer w0.2: U1.16@39.887,32.046 39.887,31.326 40.13,31.083 50.52,31.083 53.689,27.914 53.689,18.959 55.107,17.541 v1(56.205,17.541) U11.15@58.131,17.541
  Bottom Layer w0.2: R30.2@54.242,17.298 55.062,17.298 55.305,17.541 v1(56.205,17.541)
TXD14: R31.2 U1.17 U11.14 | length 29.5
  Top Layer w0.2: U1.17@41.937,34.096 43.27,34.096 44.032,33.334 48.834,33.334 54.089,28.079 54.089,19.125 55.023,18.191 v1(55.693,18.191) U11.14@58.131,18.191
  Bottom Layer w0.2: R31.2@54.242,18.314 54.808,18.314 54.931,18.191 v1(55.693,18.191)
TXD15: R33.2 U1.19 U11.13 | length 30.4
  Top Layer w0.2: U1.19@41.937,35.096 42.836,35.096 44.198,33.734 49,33.734 54.489,28.245 54.489,19.291 54.939,18.841 v1(56.205,18.841) U11.13@58.131,18.841
  Bottom Layer w0.2: R33.2@54.242,19.364 54.276,19.33 55.051,19.33 55.54,18.841 v1(56.205,18.841)
VDD_A: BC27.1 BC28.1 BC31.1 BC34.1 BC35.1 BC36.1 BC37.1 BC38.1 FB5.2 R19.2 R24.2 R37.1 U10.5 U11.1 U11.4 U11.12 U12.14 U13.5 | length 91.4
  Top Layer w0.2: BC27.1@56.951,21.734 BC28.1@56.951,23.368 FB5.2@58.674,23.368 v1@60.086,23.368 ; R37.1@57.256,51.689 v1(57.256,52.557) ; v1(59.055,52.959) U12.14@60.646,52.959 ; v1(62.529,13.641) U11.4@63.931,13.641 ; BC36.1@63.931,9.749 v1(63.931,10.795) U11.1@63.931,11.691 ; U11.12@63.931,18.841 v1(65.278,18.841) BC34.1@66.042,18.841 ; BC37.1@65.855,47.117 v1(66.675,47.117) 67.342,47.117 U13.5@67.376,47.083 ; v1(68.905,11.359) R24.2@68.905,12.022 ; U10.5@70.241,17.405 BC31.1@70.241,19.388 ; v1(73.692,19.526) R19.2@74.816,19.526
  Mid-Layer 1 w0.2: v1(57.256,52.557) 57.256,53.065 57.531,53.34 58.674,53.34 v1(59.055,52.959) 61.849,50.165 63.627,50.165 v1(66.675,47.117) 65.913,46.355 65.913,39.624 61.104,34.815 61.104,24.162 v1(60.198,23.256) 64.613,18.841 v1(65.278,18.841) 64.828,18.391 ; v1(68.905,11.359) 68.201,10.655 64.071,10.655 v1(63.931,10.795) 63.164,10.795 62.529,11.43 v1(62.529,13.641) 62.529,14.142 63.119,14.732 63.119,16.682 64.828,18.391 ; v1@70.207,18.391 70.231,18.415 72.581,18.415 v1(73.692,19.526) ; 71.35,18.391 64.828,18.391
  Bottom Layer w0.2: v1(59.055,52.959) BC38.1@59.055,53.652 ; BC35.1@61.918,13.641 v1(62.529,13.641)
  other v1: 70.231,18.288
VDD_D: BC30.1 BC32.1 BC33.1 FB4.2 FB5.1 OSC2.4 R25.1 R26.1 R27.1 R28.1 R29.1 R30.1 R31.1 R33.1 U11.18 | length 48.3
  Top Layer w0.2: BC32.1@55.822,5.022 v1(56.896,5.022) OSC2.4@58.156,5.022 ; BC30.1@56.951,24.892 v1(57.912,24.892) FB5.1@58.674,24.892 FB4.2@58.674,26.797 ; U11.18@58.131,15.591 v1(59.759,15.591)
  Mid-Layer 1 w1: v1(56.896,5.022) 59.759,7.885 v1(59.759,15.591) 57.912,17.438 v1(57.912,24.892)
  Bottom Layer w0.2: R25.1@50.961,12.545 R28.1@50.961,15.593 50.961,16.753 51.506,17.298 R30.1@53.342,17.298 ; R29.1@53.342,16.282 R30.1@53.342,17.298 ; v1@57.688,24.892 55.88,24.892 53.342,22.354 R33.1@53.342,19.364 R30.1@53.342,17.298 ; v1(59.759,15.591) BC33.1@60.383,15.591
VDDA: BC5.1 BC6.1 FB1.2 FB2.1 FB3.1 | length 6.1
  Top Layer w0.4: FB3.1@27.432,49.149 29.038,49.149 FB1.2@29.038,50.673 v1(27.94,50.673)
  Bottom Layer w0.254: BC5.1@27.12,50.673 BC6.1@27.12,51.943 ; BC5.1@27.316,50.673 v1(27.94,50.673)
VDDA1: BC1.1 BC2.1 BC12.1 BC13.1 FB2.2 U1.55 U1.57 | length 19.5
  Top Layer w0.254: v1@28.714,37.596 v1(28.956,37.596) U1.57@30.337,37.596 ; v1(28.956,38.596) U1.55@30.337,38.596
  Top Layer w0.6: v1@28.956,46.736 FB2.2@28.956,47.625
  Mid-Layer 1 w1: v1(28.956,37.596) v1(28.956,38.596) v1@28.956,46.736
  Bottom Layer w0.254: v1@29.025,38.596 31.103,38.596 BC12.1@31.115,38.608 ; v1@29.038,37.596 31.102,37.596 BC13.1@31.115,37.583 ; 29.21,46.99 BC1.1@30.061,46.99 29.903,47.148 BC2.1@29.903,48.387
  other v1: 28.956,46.818
VDDA2: BC7.1 BC8.1 C6.1 FB3.2 R5.1 R8.2 R9.2 R10.1 | length 28.8
  Top Layer w0.254: v1(24.572,31.562) R9.2@24.572,32.189 ; v1(27.62,31.562) R10.1@27.62,32.189
  Top Layer w0.3: v1(27.432,46.818) FB3.2@27.432,47.625
  Mid-Layer 1 w0.254: v1@27.554,31.496 v1(27.62,31.562)
  Mid-Layer 1 w1: v1@23.114,35.096 25.4,35.096 ; v1(24.572,31.562) 25.4,31.562 ; v1(27.432,46.818) 27.432,40.132 25.4,38.1 v1(25.4,36.703) 25.4,31.562 ; v1@27.554,31.562 25.4,31.562
  Bottom Layer w0.254: v1(23.13,35.112) R5.1@23.876,35.112 ; v1(25.4,36.703) R8.2@26.093,36.703 ; C6.1@27.62,30.906 v1(27.62,31.562)
  Bottom Layer w0.4: BC8.1@25.977,45.339 25.977,46.66 BC7.1@25.819,46.818 v1(27.432,46.818)
pads on no net: J5.7 OSC2.1 S1.8 U11.23 U16.1
copper on no net:
  other v2: 3.582,37.674 13.182,37.674

## Polygon pours and split planes (outlines as drawn)
AGND on Mid-Layer 2 "AGND" (solid, remove dead copper, pour order 14): -3.302,20.701 -3.137,20.536 49.911,20.536 49.911,-5.08 50.673,-5.842 49.784,-4.953 -3.683,-4.953
GND on Mid-Layer 2 "GND" (solid, remove dead copper, pour order 16): -6.731,83.693 83.566,83.693 83.82,83.947 82.931,83.058 82.931,-2.921 -5.842,-2.921 -6.477,-3.556
SFP_3V3A on Bottom Layer "SFP_33" (solid, remove dead copper, pour order 18): 5.942,33.401 5.715,33.628 5.715,33.909 6.096,34.29 6.223,34.417 7.283,34.417 7.31,34.417 7.691,34.798 7.782,34.889 7.782,35.433 7.782,37.627 8.001,37.846 8.382,38.227 9.197,38.227 9.382,38.042 9.577,37.847 9.577,36.576 9.577,34.485 9.382,34.29 8.185,33.093 6.731,33.093 6.13,33.093 5.942,33.281
GND on Bottom Layer "gnd_bot" (solid, remove dead copper, pour order 32): -3.556,81.788 -3.683,81.661 -3.683,-3.683 86.868,-3.683 86.741,-3.556 86.741,81.407 86.741,82.55 86.614,82.677
DC_IN on Mid-Layer 1 "DC_IN" (solid, remove dead copper, pour order 20): 47.625,61.087 48.26,61.087 48.641,61.087 48.895,61.341 49.022,61.468 49.022,62.484 49.022,63.754 48.006,64.77 42.418,70.358 36.576,70.358 12.827,70.358 9.652,67.183 9.525,67.056 9.525,65.659 9.525,64.183 9.827,63.881 9.954,63.754 10.982,63.754 12.065,63.754 13.462,65.151 14.986,66.675 22.098,66.675 23.622,68.199 28.194,68.199 41.275,68.199 44.958,64.516 46.17,63.304 46.17,62.357 46.17,62.288 47.371,61.087
+2.5V on Mid-Layer 1 "3.5V" (solid, remove dead copper, pour order 22): 27.432,61.849 26.543,60.96 26.543,60.706 26.543,54.102 27.94,52.705 30.099,50.546 30.099,47.625 30.099,31.115 30.48,30.734 31.623,29.591 38.989,29.591 41.402,29.591 43.942,32.131 44.831,33.02 44.831,35.941 44.831,39.751 45.466,40.386 45.847,40.767 48.717,40.767 49.149,40.767 49.403,41.021 49.53,41.148 49.53,41.783 49.022,42.291 46.101,42.291 41.282,42.291 39.927,43.646 39.92,43.646 32.258,51.308 32.258,53.213 32.258,54.61 29.718,57.15 28.956,57.912 28.956,59.817 28.956,61.595 28.702,61.849
VDD_A on Mid-Layer 1 "VDD_A" (solid, remove dead copper, pour order 24): 59.182,54.356 58.42,54.356 57.785,54.356 56.769,53.34 56.642,53.213 56.642,51.943 56.685,51.943 59.817,48.811 62.738,45.89 62.738,39.497 62.738,39.243 59.944,36.449 59.817,36.322 59.817,29.21 59.817,25.4 58.928,24.511 58.928,22.86 58.928,21.463 61.341,19.05 61.087,18.796 61.087,15.748 61.087,10.795 62.484,9.398 62.738,9.144 67.183,9.144 68.453,9.144 69.723,10.414 74.422,15.113 74.422,20.536 74.422,20.828 73.279,21.971 72.517,22.733 66.04,22.733 64.516,24.257 64.516,26.348 64.516,33.909 66.04,35.433 69.469,38.862 69.469,44.196 69.469,48.768 64.516,53.721 63.881,54.356 59.309,54.356
+3.3V on Mid-Layer 1 "3.3" (solid, remove dead copper, pour order 30): 19.787,57.277 16.763,57.277 16.763,57.149 15.113,55.499 14.859,55.245 14.859,51.181 14.859,50.673 17.907,47.625 20.955,44.577 20.955,42.086 20.955,41.461 19.431,39.937 17.101,37.607 17.101,34.544 17.101,33.828 14.224,30.951 13.626,30.353 6.731,30.353 5.697,30.353 4.681,29.337 4.427,29.083 4.427,24.454 4.427,24.142 4.953,23.615 5.962,22.606 15.552,22.606 49.007,22.606 50.546,24.145 54.016,27.616 57.15,27.616 58.845,27.616 59.409,28.179 59.409,29.109 59.409,29.547 58.801,30.156 58.652,30.304 56.261,30.304 25.071,30.304 24.92,30.456 23.7,31.675 23.7,31.75 23.7,37.36 25.203,38.862 25.632,39.292 25.632,40.636 25.632,46.907 24.049,48.49 20.349,52.19 20.349,52.959 20.349,56.74 19.812,57.277
GND on Top Layer "gnd_top" (solid, remove dead copper, pour order 34): -1.27,82.296 -3.048,80.518 -3.048,-2.667 86.614,-2.667 87.249,-3.302 87.249,80.772 88.519,82.042

## Keep-outs
Keep-Out Layer:
  lines w0.254: 0,0 0,80 80,80 80,0 0,0
Multi-Layer:
  lines w0.254: 0,0 0,80 80,80 80,0 0,0

## Other copper
Top Layer:
  region net +3.3V: 16.129,54.991 15.507,54.369 15.507,50.776 17.642,48.641 18.669,48.641 19.304,49.276 19.304,54.61 18.923,54.991
  region net +2.5V: 29.845,61.468 27.559,61.468 27.051,60.96 27.051,56.681 27.725,56.007 29.718,56.007 30.226,56.515 30.226,61.087
  region net DC_IN: 45.72,62.611 47.25,62.611 47.377,62.738 48.461,62.738 48.717,62.482 48.717,61.709 48.476,61.468 47.244,61.468 46.609,62.103 45.847,62.103 45.72,62.23
Mid-Layer 1:
  rectangle net GND: 32.385,33.966 40.063,41.738
  region net DC_CON_IN: 7.239,72.009 7.747,71.501 7.747,70.866 7.493,70.612 6.985,70.612 6.223,71.374 6.223,71.755 6.477,72.009
Bottom Layer:
  region net +3.3V: 15.113,54.991 17.527,54.991 18.161,54.357 18.161,51.181 18.796,50.546 20.32,50.546 20.574,50.292 20.574,49.911 15.748,49.911 15.113,50.546
  region net +2.5V: 29.083,61.214 27.432,61.214 27.178,60.96 27.178,55.945 28.132,54.991 29.591,54.991 30.01,55.41 30.01,63.081 29.972,63.119 29.337,63.119 29.083,62.865
  region net PSE_A: 9.902,70.999 10.402,70.999 11.052,71.649 11.052,72.649 11.684,72.649 11.684,72.321 13.647,72.321 17.844,76.518 17.844,76.519 18.668,77.343 19.939,77.343 20.701,76.581 20.701,75.253 19.997,74.549 17.399,74.549 14.114,71.396 12.144,71.368 11.381,70.485 10.126,70.485 9.902,70.709
  region net DC_CON_IN: 9.402,70.999 8.902,70.999 8.252,71.649 8.252,72.649 7.879,72.649 7.552,72.322 5.461,72.322 5.461,71.852 6.828,70.485 9.159,70.485 9.402,70.728
  region net +3.3V: 5.911,32.131 5.715,31.935 5.715,29.083 6.169,28.629 7.42,28.629 7.963,29.172 7.963,29.899 6.604,31.258 6.604,32.004 6.477,32.131
  region net DC_IN: 38.989,66.802 38.994,66.807 45.334,66.807 46.863,65.278 48.006,65.278 48.768,64.516 48.768,61.849 48.387,61.468 47.194,61.468 46.94,61.722 46.94,63.423 44.704,65.659 39.37,65.659 38.989,66.04
  region net DC_IN: 10.126,63.881 9.779,64.228 9.779,66.548 10.033,66.802 10.541,66.802 10.795,66.548 10.753,66.506 10.753,64.093 10.541,63.881

## Silkscreen, mask and mechanical layers (free items; w line width, h text height)
Top Overlay:
  lines w0.254: 50,0 50,80
  text "Electro-Optic Coverter" at 54.991,74.041 h2
  text "Engeering Sample V0.9" at 59.944,71.755 h1
  text "X-BEAM TECH" at 41.448,52.959 h1
  text "MC0202SI" at 52.578,44.577 h1
  text "Ver. 1.01" at 52.959,43.561 h1

## Text inside footprints (layer, text, board x,y; h text height)
D2: Bottom Overlay "~" at 28.755,68.364 h1 r180; Bottom Overlay "~" at 28.73,65.789 h1 r180; Bottom Overlay "-" at 31.23,65.939 h1 r180; Bottom Overlay "+" at 31.205,68.589 h1 r180